# Altium PCB IMU.PcbDoc
Units mil, origin at the board's own origin, x right, y up, seen from the top; angles counter-clockwise.
Board outline 3160 x 2730 mil, 2 copper layers (Top Layer, Bottom Layer); 5 components, 8 nets, 21 pads, 0 vias.
Unrouted connection lines stored in the file: 1.
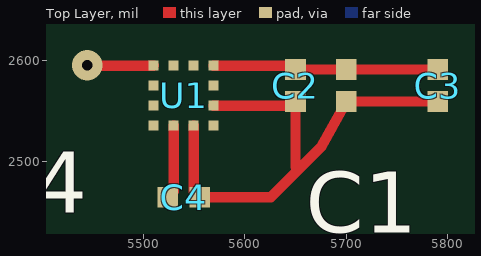
[diagram p0: Top Layer view]
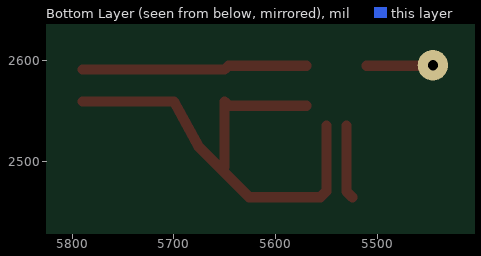
[diagram p1: Bottom Layer view, seen from below]

## Layer stack, top to bottom
Top Solder: solder mask 0.4, Solder Resist, Dk 3.5
Top Layer: signal copper 1.4
Dielectric 1: dielectric 12.6, FR-4, Dk 4.8
Bottom Layer: signal copper 1.4
Bottom Solder: solder mask 0.4, Solder Resist, Dk 3.5

## Board outline
3840,3730 7000,3730 7000,1000 3840,1000

## Design rules (kind name [scope] priority, off if disabled: settings)
Clearance [All] p1: gap=10 ignorepadtopadclearanceinfootprint=FALSE except(0: Arc-Hole Track-Hole SMDPad-Hole THPad-Hole Via-Hole Fill-Hole Poly-Hole Region-Hole Text-Hole)
PolygonConnect [All] p1: connectstyle=Relief reliefconductorwidth=10 reliefentries=4 polygonreliefangle="90 Angle" airgapwidth=10
RoutingVias [All] p1: holewidth=28 width=50 viastyle="Through Hole" minholewidth=28 minwidth=50 maxholewidth=28 maxwidth=50
SolderMaskExpansion [All] p1: expansion=4
Width [All] p1: maxlimit=10 minlimit=10 preferedwidth=10
30 further rules are at their usual default settings.

## Components (designator, comment, footprint, x,y, rotation, side; value= is the part's Value field where it differs from the comment)
C1 "10uF" CAPC0402(1005)60_L 5700,2575 r90 top
C2 "0.1uF" CAPC0402(1005)60_L 5650,2575 r270 top
C3 "0.1uF" CAPC0402(1005)60_L 5790,2575 r270 top
C4 "220nF" CAPC0402(1005)60_L 5540,2465 r180 top
U1 "LSM303AHTR" LSM303AHTR 5540,2565 r0 top

## Footprints (in the part's own frame and the unit in brackets; to place one, negate y for a bottom-side part, rotate by r counter-clockwise, add the part's x,y. Pads: shape width x height; smd on the part's side, far side on the other; paste and mask are expansions set on the pad)
CAPC0402(1005)60_L [mm] "Chip Capacitor, Body 1.0x0.5mm, Height 0.6mm, IPC High Density"
  rect 0.52x0.52 smd: 1(-0.4,0) 2(0.4,0)
  body extent -0.55,-0.3 0.55,0.3, height 0.6
LSM303AHTR [mm] "LGA, 12-Leads, Body 2.00x2.00mmx1.00mm, Pitch 0.50mm"
  rect 0.25x0.25 smd: 1(-0.75,0.75) 2(-0.75,0.25) 3(-0.75,-0.25) 4(-0.75,-0.75) 5(-0.25,-0.75) 6(0.25,-0.75) 7(0.75,-0.75) 8(0.75,-0.25) 9(0.75,0.25) 10(0.75,0.75) 11(0.25,0.75) 12(-0.25,0.75)
  body extent -1.05,-1.05 1.05,1.05, height 1

## Part data
C1 C2 C3 C4: library part CMP-1034-00252-1, "CAP CER 0.1UF 10V X7R 0402", Manufacturer="Murata Electronics North America", Manufacturer Part Number=GRM155R71A104KA01D, Operating Temperature="-55°C ~ 125°C", Package / Case="0402 (1005 Metric)", Ratings=-, Supplier Part Number 1=490-6321-1-ND, Temperature Coefficient=X7R, Tolerance=±10%, Voltage - Rated=10V, Applications="General Purpose", Category=Capacitors, ComponentLink1Description=http://www.murata.com/~/media/webrenewal/support/library/catalog/products/capacitor/mlcc/c02e.ashx?la=en-us, ComponentLink1URL=http://www.murata.com/~/media/webrenewal/support/library/catalog/products/capacitor/mlcc/c02e.ashx?la=en-us, Features=-, Height - Seated (Max)=-, Lead Spacing=-, Mounting Type="Surface Mount, MLCC", Packaging="Cut Tape (CT)", Part Status=Active, Pricing 1="1=0.1, 10=0.014, 100=0.0063, 500=0.00446, 1000=0.00351, 2500=0.00319, 5000=0.00293 (USD)", RoHS="RoHS Compliant", Size / Dimension="0.039\" L x 0.020\" W (1.00mm x 0.50mm)", Stock 1=2920395, Supplier 1=Digi-Key, Thickness (Max)="0.022\" (0.55mm)"
U1: Manufacturer=STMicroelectronics, Operating Temperature="-40°C ~ 85°C (TA)", Supplier Part Number 1=497-17053-1-ND, Category="Sensors, Transducers", ComponentLink1Description=http://www.st.com/content/ccc/resource/technical/document/datasheet/1b/a1/fd/09/9f/41/44/cf/DM00177690.pdf/files/DM00177690.pdf/jcr:content/translations/en.DM00177690.pdf, ComponentLink1URL=http://www.st.com/content/ccc/resource/technical/document/datasheet/1b/a1/fd/09/9f/41/44/cf/DM00177690.pdf/files/DM00177690.pdf/jcr:content/translations/en.DM00177690.pdf, Manufacturer Part Number=LSM303AHTR, Output Type="I²C, SPI", Part Status=Active, Pricing 1="1=3, 10=2.697, 100=2.2094, 500=1.88078 (USD)", RoHS="RoHS Compliant", Sensor Type="Accelerometer, Magnetometer, Temperature, 3 Axis", Stock 1=7343, Supplier 1=Digi-Key

## Free pads (board coordinates)
  round 30 hole 10: 4(5445,2595)

## Nets (pads, with @x,y where several pads share a name; then routed paths per layer and width w, separated by ;. In a path a pad name is that pad's centre, name@x,y a point inside that pad or via, vN(x,y) a via of type N, cw(c..) or ccw(c..) an arc to the next point about the centre after c; other vN are vias at no path point)
+3.3: C1.2 C2.1 C3.1 U1.9 U1.10 | length 222
  Top Layer w10: U1.10 5646.22,2594.53 C2.1 C1.2 C3.1
GND: C1.1 C2.2 C3.2 C4.1 U1.6 U1.8 | length 504.5
  Top Layer w10: U1.6 5549.84,2470.91 C4.1 5625.75,2465 5652.87,2492.13 ; U1.8 5645.91,2555.16 C2.2 5650,2495 5652.87,2492.13 ; C3.2 C1.1 5675,2514.25 5652.87,2492.13
IMU_CS0: U1.2
INT1: U1.11
INT2: U1.12
INT_MAG_RDY: U1.7
NetC4_2: C4.2 U1.5 | length 72.9
  Top Layer w10: C4.2 5530.16,2470.91 U1.5
SPI0_SCLK: U1.1 | length 65
  Top Layer w10: 5445.47,2594.53 U1.1
pads on no net: U1.3 U1.4